# Altium PCB MainBoardReceive.PcbDoc
Units mil, origin at the board's own origin, x right, y up, seen from the top; angles counter-clockwise.
Board outline 3900 x 2915 mil, 2 copper layers (Top Layer, Bottom Layer); 53 components, 33 nets, 163 pads, 11 vias.
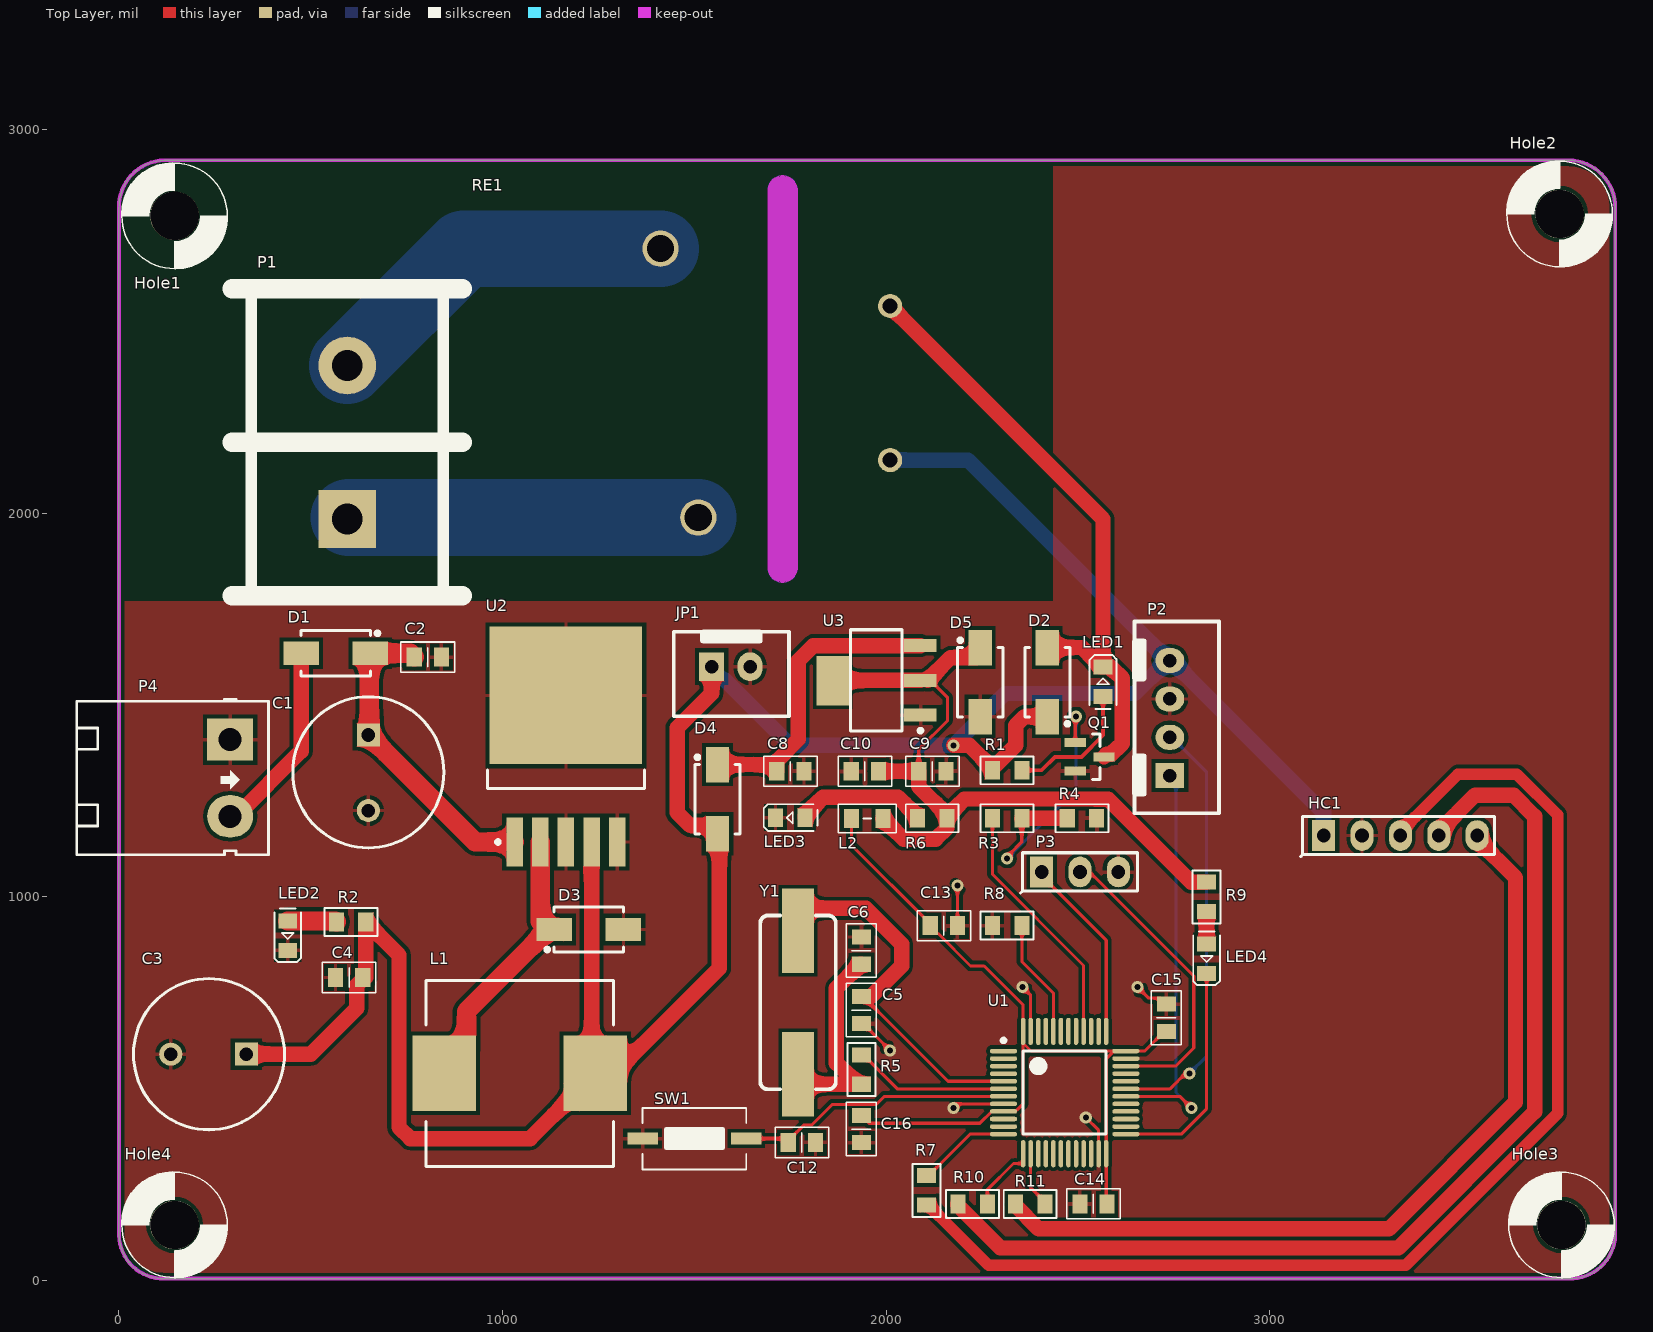
[diagram p0: Top Layer view]
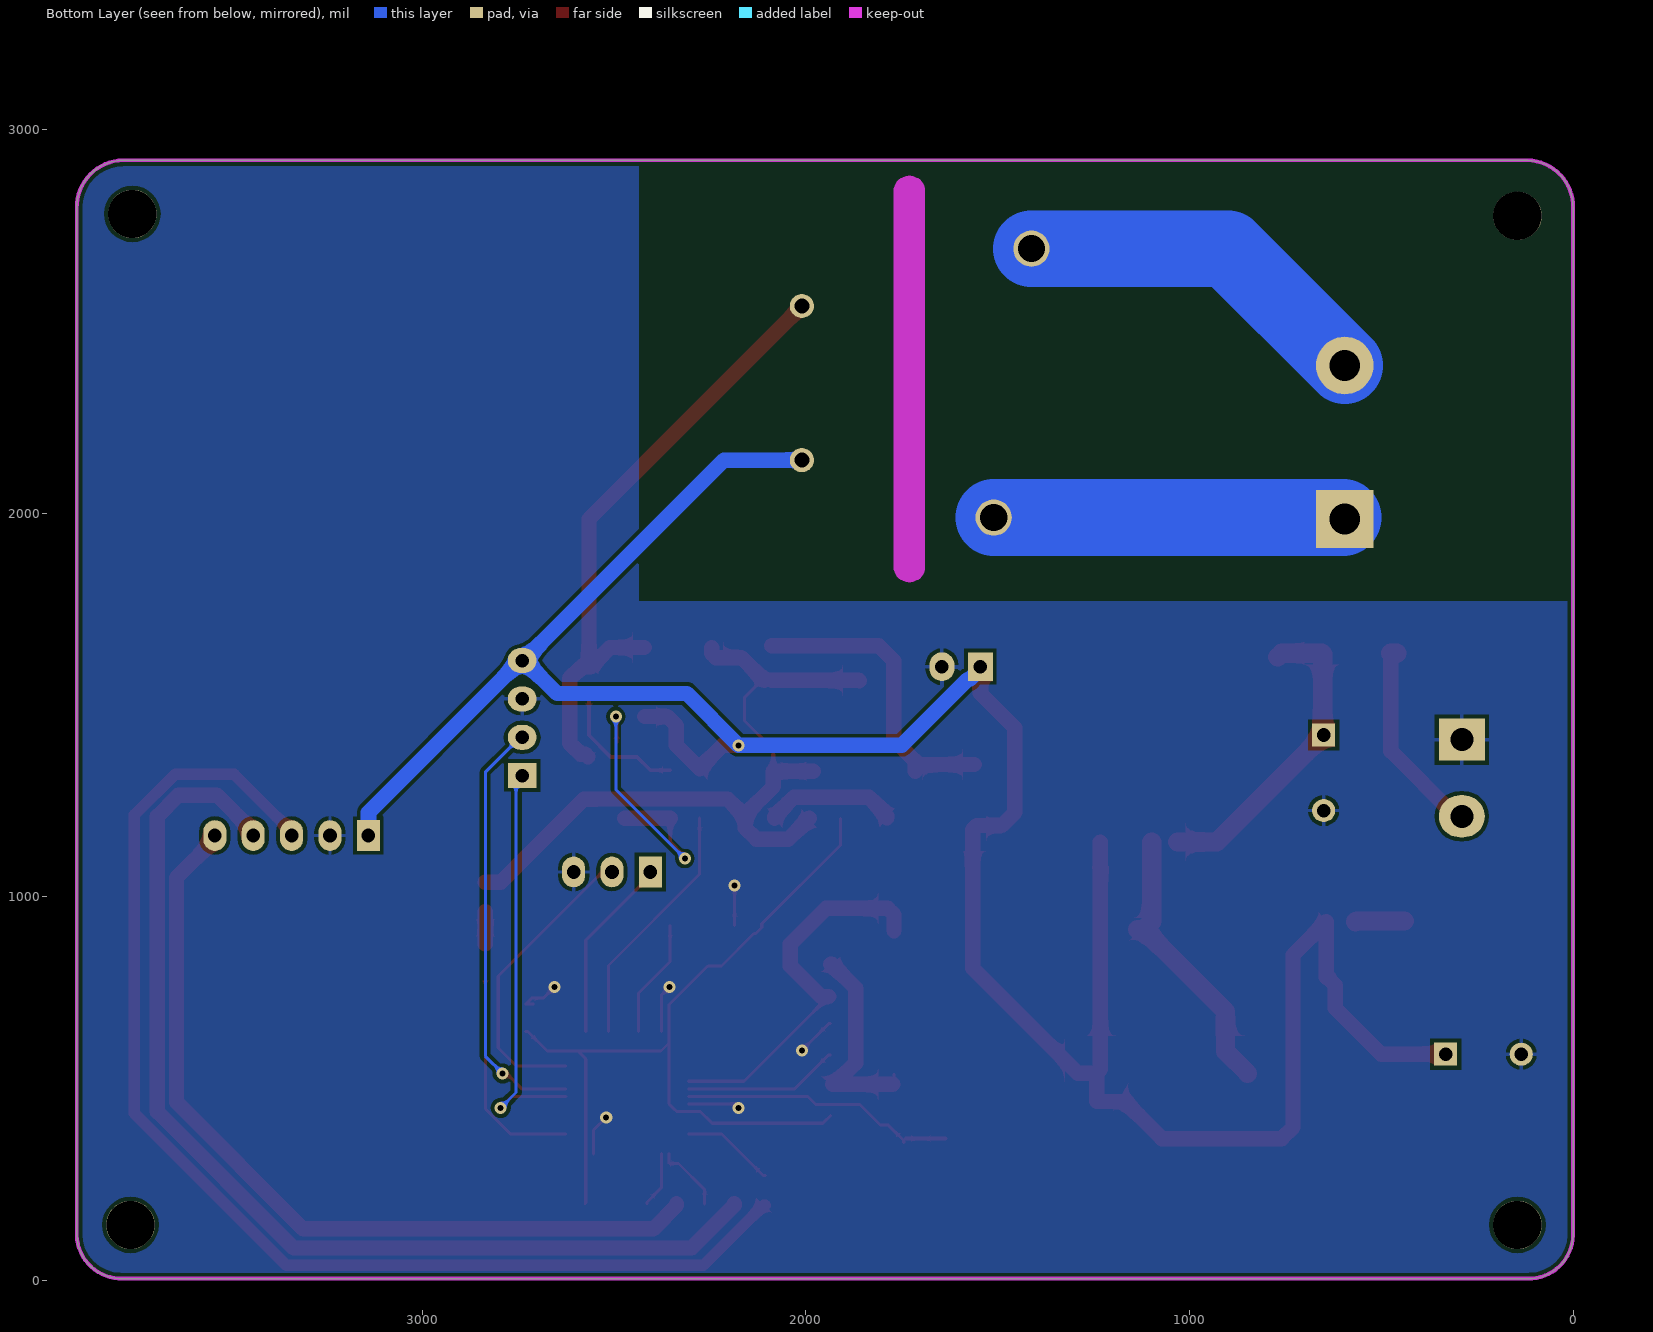
[diagram p1: Bottom Layer view, seen from below]

## Layer stack, top to bottom
Top Solder: solder mask 0.4, Solder Resist, Dk 3.5
Top Layer: signal copper 1.4
Dielectric 1: dielectric 12.6, FR-4, Dk 4.8
Bottom Layer: signal copper 1.4
Bottom Solder: solder mask 0.4, Solder Resist, Dk 3.5

## Board outline
118.11,5 cw(c115.61,120.61) 0,118.11 0,2795.28 cw(c121.42,2798.58) 118.11,2920 3779.53,2920 cw(c3777.4,2797.4) 3900,2795.28 3900,118.11 cw(c3783.21,121.79) 3779.53,5
cut-out: 1690.61,1860 ccw(c1730,1860) 1769.39,1860 1769.39,2840 ccw(c1730,2840) 1690.61,2840

## Design rules (kind name [scope] priority, off if disabled: settings)
Clearance [All] p1: gap=10 ignorepadtopadclearanceinfootprint=FALSE except(0: Arc-Hole Track-Hole SMDPad-Hole THPad-Hole Via-Hole Fill-Hole Poly-Hole Region-Hole Text-Hole; 5: Track-SMDPad SMDPad-SMDPad)
PolygonConnect [All] p1: thpad.connectstyle=Relief thpad.reliefconductorwidth=10 thpad.reliefentries=4 thpad.polygonreliefangle="90 Angle" thpad.airgapwidth=10 smdpad.connectstyle=Relief smdpad.reliefconductorwidth=10 smdpad.reliefentries=4 smdpad.polygonreliefangle="90 Angle" smdpad.airgapwidth=10 via.connectstyle=Direct via.reliefconductorwidth=10 via.reliefentries=4 via.polygonreliefangle="90 Angle" via.airgapwidth=10
RoutingVias [All] p1: holewidth=11.81 width=23.62 viastyle="Through Hole" minholewidth=11.81 minwidth=23.62 maxholewidth=11.81 maxwidth=23.62
SolderMaskExpansion [All] p1: expansion=4
Width [All] p1: maxlimit=200 minlimit=8 preferedwidth=8 minimp=50.000000 maximp=50.000000 favimp=50.000000
30 further rules are at their usual default settings.

## Components (designator, comment, footprint, x,y, rotation, side; value= is the part's Value field where it differs from the comment)
C1 "470uF/50V" CR/D.10.0x16.0/P.5.0 650,1421.85 r270 top
C2 "100nF" "C 0805 (2012)" 805,1625 r0 top
C3 "1000uF/16V" CR/D.10.0x12.5/P.5.0 331.85,590 r180 top
C4 "100nF" "C 0805 (2012)" 600,790 r180 top
C5 "22pF" "C 0805 (2012)" 1935,705 r270 top
C6 "22pF" "C 0805 (2012)" 1935,860 r90 top
C8 "10uF" "C 0805 (2012)" 1750,1327.58 r0 top
C9 "10uF" "C 0805 (2012)" 2120,1327.58 r0 top
C10 "100nF" "C 0805 (2012)" 1944.09,1327.58 r180 top
C12 "100nF" "C 0805 (2012)" 1780,360 r0 top
C13 "100nF" "C 0805 (2012)" 2150,925 r0 top
C14 "100nF" "C 0805 (2012)" 2540,200 r180 top
C15 "100nF" "C 0805 (2012)" 2730,685 r90 top
C16 "10uF" "C 0805 (2012)" 1935,395 r270 top
D1 "SS34" "DO-214AC (SMA)" 565,1635 r0 top
D2 "M7" "DO-214AC (SMA)" 2420,1560 r270 top
D3 "SS34" "DO-214AC (SMA)" 1225,915 r180 top
D4 "SS14" "DO-214AC (SMA)" 1560,1255 r90 top
D5 "SS14" "DO-214AC (SMA)" 2245,1560 r90 top
HC1 "HC12RF" HC12RF 3140,1160 r0 top
Hole1 "3mm" SCREW/3M/7M 145,2775 r0 top
Hole2 "3mm" SCREW/3M/7M 3755,2780 r0 top
Hole3 "3mm" SCREW/3M/7M 3760,145 r0 top
Hole4 "3mm" SCREW/3M/7M 145,145 r0 top
JP1 "JP2" "CON Header 2" 1745,1600 r0 top value="Connector 2"
L1 "100uH" "Inductor SMD 12x12x8" 1045,540 r0 top value="150 mH"
L2 "600 Ohm" "Inductor SMD 0805 (2012)" 1950,1204.55 r0 top
LED1 "Blue Led" "Led SMD 0805" 2565,1560 r90 top
LED2 "Red Led" "Led SMD 0805" 440,900 r270 top
LED3 "Blue Led" "Led SMD 0805" 1750.65,1206.42 r180 top
LED4 "Blue Led" "Led SMD 0805" 2835,840 r270 top
P1 "Header 2" "HDR Terminal 2" 595,1985 r90 top
P2 "Header 4" "CON Header 4" 2710,1515 r90 top
P3 "Header 3" "Header 3" 2405,1065 r0 top
P4 "Header 2" "HDR Domino 2" 290,1410 r270 top
Q1 "C1815" SOT-23 2530,1365 r0 top
R1 "10k" "R 0805 (2012)" 2315,1330 r180 top
R2 "10k" "R 0805 (2012)" 605,935 r0 top
R3 "4k7" "R 0805 (2012)" 2315,1205 r0 top
R4 "47k" "R 0805 (2012)" 2510,1205 r180 top
R5 "330" "R 0805 (2012)" 1935,550 r270 top
R6 "4k7" "R 0805 (2012)" 2119.55,1205 r0 top
R7 "1k" "R 0805 (2012)" 2105,235 r270 top
R8 "10k" "R 0805 (2012)" 2315,925 r0 top
R9 "2k2" "R 0805 (2012)" 2835,1000 r90 top
R10 "1k" "R 0805 (2012)" 2225,200 r180 top
R11 "1k" "R 0805 (2012)" 2375,200 r0 top
RE1 "Relay 5" Relay4 2010,2138.43 r90 top
SW1 "Button" SW/2/SMD 1500,370 r0 top
U1 "STM32F103C8T6" LQFP48_N 2465,490 r0 top
U2 "LM2596S-5.0" TO-263-5 1165,1391.14 r90 top
U3 "AMS1117-3V3" SOT-223 1975,1564.43 r180 top
Y1 "8Mhz" "Crystal HC49US SMD" 1770,725 r90 top

## Footprints (in the part's own frame and the unit in brackets; to place one, negate y for a bottom-side part, rotate by r counter-clockwise, add the part's x,y. Pads: shape width x height; smd on the part's side, far side on the other; paste and mask are expansions set on the pad)
"C 0805 (2012)" [mm] "Chip Capacitor, 2-Leads, Body 2.0x1.3mm, IPC Medium Density"
  rect 1x1.25 smd: 1(-0.9,0) 2(0.9,0)
  silkscreen extent -1.78,-1 1.78,1, body extent -1,-0.64 1,0.61, height 0.6
"CON Header 2" [mil]
  rect 65x75 hole 35.43: 1(-200,0)
  oval 65x75 hole 35.43: 2(-100,0)
  silkscreen extent -299,-129 1,96, body extent -297,-134 -2,94, height 286
"CON Header 4" [mil]
  rect 65x75 hole 35.43: 1(-199,-29)
  oval 65x75 hole 35.43: 2(-99,-29) 3(1,-29) 4(101,-29)
  silkscreen extent -297,-157 203,68, body extent -294,-162 195,64, height 290
CR/D.10.0x12.5/P.5.0 [mil]
  rect 60x60 hole 35.43: 1(0,0)
  round 60 hole 35.43: 2(196.85,0)
  silkscreen extent -100,-197 294,197, body extent -109,-208 304,205, height 551
CR/D.10.0x16.0/P.5.0 [mil]
  rect 60x60 hole 35.43: 1(0,0)
  round 60 hole 35.43: 2(196.85,0)
  silkscreen extent -100,-197 294,197, body extent -110,-206 304,208, height 689
"Crystal HC49US SMD" [mil]
  rect 220.47x82.67 smd: 1(-187,0) 2(187,0)
  silkscreen extent -226,-98 226,98, body extent -250,-93 250,92, height 165
"DO-214AC (SMA)" [mm] "Molded Diode, 2-Leads, Body 4.3x2.7mm, IPC Medium Density"
  rect 2.35x1.55 smd: 1(-2.286,0) 2(2.286,0)
  silkscreen extent -2.3,-1.5 2.89,1.5, body extent -2.6,-1.3 2.6,1.3, height 2.4
HC12RF [mil]
  rect 60x80 hole 35.43: 1(0,0)
  oval 60x80 hole 35.43: 2(100,0) 3(200,0) 4(300,0) 5(400,0)
  silkscreen extent -60,-55 445,50, body extent -50,-50 450,50, height 350
"HDR Domino 2" [mil] "Header 2, 2 pin, hight 300mil, Pin to Pin 200, Colour Green"
  rect 110x120 hole 60: 1(0,0)
  oval 110x120 hole 60: 2(200,0)
  silkscreen extent -105,-400 300,100, body extent -90,-402 302,70, height 334
"HDR Terminal 2" [mil]
  rect 150x150 hole 80: 1(0,0)
  round 150 hole 80: 2(400,0)
  silkscreen extent -200,-300 600,300
"Header 3" [mil]
  rect 60x80 hole 35.43: 1(0,0)
  oval 60x80 hole 35.43: 2(100,0) 3(200,0)
  silkscreen extent -55,-55 250,50, body extent -50,-50 250,50, height 350
"Inductor SMD 12x12x8" [mm] "Precision Wire Wound Inductor, 2-Leads, Body 12.3x12.3mm, IPC Low Density"
  rect 4.2x5 smd: 1(-5,0) 2(5,0)
  silkscreen extent -6.2,-6.15 6.2,6.15, body extent -6.25,-6.25 6.25,6.25, height 8.01
"Inductor SMD 0805 (2012)" [mm] "Precision Wire Wound Inductor, 2-Leads, Body 2.0x1.2mm, IPC Medium Density"
  rect 1x1.25 smd: 1(-1.041,0) 2(1.041,0)
  silkscreen extent -1.92,-0.95 1.92,0.95, body extent -1.05,-0.6 0.95,0.6, height 0.95
"Led SMD 0805" [mm] "Led SMD 0805"
  rect 1x1.25 smd: 1(-0.95,0) 2(1,0)
  silkscreen extent -1.78,-0.89 1.78,0.89, body extent -1.01,-0.62 1.01,0.63, height 1.1
LQFP48_N [mm] "Thin QFP, 48-Leads, Body 7x7mm, Pitch 0.5mm, IPC Medium Density"
  oval 1.8x0.3 smd: 1(-4.05,2.75) 2(-4.05,2.25) 3(-4.05,1.75) 4(-4.05,1.25) 5(-4.05,0.75) 6(-4.05,0.25) 7(-4.05,-0.25) 8(-4.05,-0.75) 9(-4.05,-1.25) 10(-4.05,-1.75) 11(-4.05,-2.25) 12(-4.05,-2.75) 25(4.05,-2.75) 26(4.05,-2.25) 27(4.05,-1.75) 28(4.05,-1.25) 29(4.05,-0.75) 30(4.05,-0.25) 31(4.05,0.25) 32(4.05,0.75) 33(4.05,1.25) 34(4.05,1.75) 35(4.05,2.25) 36(4.05,2.75)
  oval 0.3x1.8 smd: 13(-2.75,-4.05) 14(-2.25,-4.05) 15(-1.75,-4.05) 16(-1.25,-4.05) 17(-0.75,-4.05) 18(-0.25,-4.05) 19(0.25,-4.05) 20(0.75,-4.05) 21(1.25,-4.05) 22(1.75,-4.05) 23(2.25,-4.05) 24(2.75,-4.05) 37(2.75,4.05) 38(2.25,4.05) 39(1.75,4.05) 40(1.25,4.05) 41(0.75,4.05) 42(0.25,4.05) 43(-0.25,4.05) 44(-0.75,4.05) 45(-1.25,4.05) 46(-1.75,4.05) 47(-2.25,4.05) 48(-2.75,4.05)
  silkscreen extent -4.17,-2.75 2.75,3.57, body extent -4.5,-4.47 4.5,4.53, height 1.6
"R 0805 (2012)" [mm] "Chip Resistor, 2-Leads, Body 2.0x1.3mm, IPC Medium Density"
  rect 1x1.25 smd: 1(-0.975,0) 2(0.975,0)
  silkscreen extent -1.75,-0.92 1.75,0.92, body extent -1,-0.61 1,0.59, height 0.5
Relay4 [mm]
  round 1.6 hole 1: 1(0,0) 2(10.2,0)
  round 2.4 hole 1.8: 3(-3.8,12.7) 4(14,15.2)
  body extent -7.96,-7.16 19.47,25.36, height 20.04
SCREW/3M/7M [mm]
  round 3.2 hole 3.2: 1(0,0)
  silkscreen extent -3.54,-3.53 3.53,3.54
SOT-23 [mm] "SOT23, 3-Leads, Body 3.0x2.5mm (max), Pitch 0.95mm, IPC Medium Density"
  rect 1.4x0.6 smd: 1(-0.95,0.95) 2(-0.95,-0.95) 3(0.95,0)
  silkscreen extent 0.2,-1.5 0.7,1.5, body extent -1.28,-1.46 1.27,1.46, height 0.95
SOT-223 [mm] "SOT223, 4-Leads, Body 6.7x7.3mm (max), Pitch 2.30mm, IPC Medium Density"
  rect 2.15x0.85 smd: 1(-2.899,2.3) 2(-2.899,0) 3(-2.899,-2.3)
  rect 2.15x3.25 smd: 4(2.899,0.025)
  silkscreen extent -3.02,-3.35 1.72,3.45, body extent -3.51,-3.25 3.49,3.25, height 1.64
SW/2/SMD [mil]
  rect 80x31.5 smd: 1(-135,0) 2(135,0)
  silkscreen extent -135,-80 135,80, body extent -120,-73 120,73, height 98
TO-263-5 [mm] "D2-PAK, 6-Pads, Body 8.9x10.4mm (max), IPC Medium Density"
  rect 3.25x1.1 smd: 1(-6.3,3.4) 2(-6.3,1.7) 3(-6.3,0) 4(-6.3,-1.7) 5(-6.3,-3.4)
  rect 9.1x10.1 smd: 6(3.4,0)
  silkscreen extent -6.42,-5.2 -1.55,5.2, body extent -7.56,-4.98 8.11,5.02, height 4.83

## Part data
C1 C3: library part Capacitor, "Capacitor pol"
C2 C4 C5 C6 C8 C9 C10 C12 C13 C14 C15 C16: library part "Capacitor NP", "Capacitor non-pol"
D1 D3 D4 D5: library part "Diode Schottky", "Schottky Diode", Code_JEDEC=DO-214-AA, LatestRevisionDate=17-Jul-2002, LatestRevisionNote="Re-released for DXP Platform.", PackageReference=SMB, Published=8-Jun-2000, Publisher="Altium Limited"
D2: library part Diode, "Default Diode", Code_JEDEC=DO-214-AB, LatestRevisionDate=17-Jul-2002, LatestRevisionNote="Re-released for DXP Platform.", PackageReference=SMC, PackageVersion=Sep-1996, Published=8-Jun-2000, Publisher="Altium Limited"
Hole1 Hole2 Hole3 Hole4: library part Screw
JP1: library part Con2, "Connector 2"
L1: library part L1, "Inductor"
L2: library part Inductor, "Inductor"
LED1 LED2 LED3 LED4: library part Led, "Typical LED"
P1 P4: "Header, 2-Pin", LatestRevisionDate=17-Jul-2002, LatestRevisionNote="Re-released for DXP Platform.", Publisher="Altium Limited"
P2: "Header, 4-Pin"
P3: "Header, 3-Pin"
Q1: library part "Transistor NPN", "NPN Bipolar Transistor"
R1 R2 R3 R4 R5 R6 R7 R8 R9 R10 R11: library part Resistor, "Resistor", LatestRevisionDate=17-Jul-2002, LatestRevisionNote="Re-released for DXP Platform.", PackageReference=AXIAL-0.3, Published=8-Jun-2000, Publisher="Altium Limited"
SW1: library part "SW SPST", "Tact switch 2 pin"
U1: "STM32 ARM-based 32-bit MCU with 64 Kbytes Flash, 48-pin LQFP, Industrial Temperature", ComponentLink1Description="Manufacturer Link", ComponentLink1URL=www.st.com/stm32, ComponentLink2Description=Datasheet, ComponentLink2URL=http://www.st.com/stonline/products/literature/ds/13587.pdf, DatasheetVersion="rev6, Mar-2008", PackageDescription="48-Pin Low-Profile Quad Flat Pack, 7 x 7 mm Body, 0.5 mm Pitch (LQFP48)", PackageReference=LQFP48, PackageVersion=Mar-2008, Published=30-May-2008, Publisher="Altium Limited"
U2: library part LM2576/96, "SIMPLE SWITCHER® 3A Step-Down Voltage Regulator"
U3: library part AMS1117, "1A LDO Voltage Regulator, ADJ or fixed 1.5/1.8/2.5/2.85/3.3/5V"
Y1: library part Crystal

## Via types
v1: diameter 31.5, hole 15.75, Top Layer to Bottom Layer, tented both sides, 10 vias
v2: diameter 31.5, hole 15.75, Top Layer to Bottom Layer, 1 vias

## Nets (pads, with @x,y where several pads share a name; then routed paths per layer and width w, separated by ;. In a path a pad name is that pad's centre, name@x,y a point inside that pad or via, vN(x,y) a via of type N, cw(c..) or ccw(c..) an arc to the next point about the centre after c; other vN are vias at no path point)
3V3: C9.1 C10.1 D5.2 L2.2 R6.2 R9.2 U3.2 U3.4 | length 1993.2
  Top Layer w8: C9.1 2084.57,1384.57 2160,1460 2160,1519.17 2114.73,1564.43 2108.2,1564.43 U3.2
  Top Layer w40: U3.4 1861.86,1564.43 U3.2 ; C10.1 C9.1 2084.57,1288.31 2157.93,1214.95 R6.2@2157.93,1209.29 ; L2.2 2045.15,1150.39 2128.64,1150.39 2157.93,1179.68 R6.2 R6.2@2157.93,1209.29 ; U3.2@2108.2,1564.43 2167.5,1623.74 2234.49,1623.74 2245,1634.25 D5.2 ; R9.2 2794.65,1038.39 2578.43,1254.61 2545.39,1254.61 2545,1255 2203.64,1255 R6.2@2157.93,1209.29
DEBUG_LED: LED4.2 U1.25 | length 590.7
  Top Layer w8: U1.25 2768.8,381.73 2835,447.93 LED4.2
GND: C1.2 C2.2 C3.2 C4.2 C5.2 C6.2 C8.2 C9.2 C10.2 C12.2 C13.2 C14.2 C15.2 C16.2 D3.1 D5.1 HC1.2 JP1.2 LED2.2 LED3.2 P2.3 P3.3 P4.1 Q1.2 R4.1 R8.1 SW1.1 U1.8 U1.23 U1.35 U1.47 U2.3 U2.5 U2.6 U3.1 | length 697.6
  Top Layer w8: C5.2 1939.92,669.57 v1(2009.49,600) v1@2010,600 ; v1(2175,450) 2185.47,460.47 U1.8 ; v1@2180,1035 v1(2185.43,1029.57) C13.2 ; v1(2355,765) 2376.42,743.58 U1.47 ; v2(2520,425) 2553.58,391.42 U1.23 ; v1(2655,765) 2683.88,736.12 2714.31,736.12 C15.2 C15.2@2709.57,720.43
NetC5_1: C5.1 U1.5 Y1.2 | length 1009.1
  Top Layer w8: C5.1 1939.92,740.43 2160.83,519.53 U1.5
  Top Layer w40: Y1.2 1770,953.67 1786.33,970 1947.15,970 2040,877.15 2040,820 1960.43,740.43 C5.1@1939.92,740.43
NetC6_1: C6.1 R5.2 Y1.1 | length 553.9
  Top Layer w8: Y1.1 1770,514.45 Y1.1@1772.84,511.61 ; R5.2@1930.08,511.61 R5.2
  Top Layer w40: Y1.1@1772.84,511.61 R5.2@1925.05,511.61 ; R5.2@1930.08,511.61 R5.2@1925.05,511.61 ; C6.1 1932.42,824.57 1870,762.15 1870,566.67 R5.2@1925.05,511.61
NetC8_1: C8.1 D4.2 U3.3 | length 807.9
  Top Layer w40: D4.2 1697.15,1345 C8.1 1714.57,1354.57 1770.13,1410.13 1770.13,1615.13 1810,1655 U3.3
NetC12_1: C12.1 SW1.2 U1.7 | length 717.5
  Top Layer w8: C12.1 1744.57,364.92 1784.65,405 1805,405 1859.12,459.12 1974.12,459.12 1995.16,480.16 U1.7
  Top Layer w10: SW1.2 C12.1@1738.86,370
NetD1_1: D1.1 P4.2 | length 526.2
  Top Layer w40: P4.2 305,1210 475,1380 D1.1
  Top Layer w50: D1.1@459.25,1635 D1.1
NetD2_1: D2.1 LED1.2 Q1.3 RE1.2 | length 1631
  Top Layer w40: RE1.2 2565,1985 LED1.2 ; D2.1 2510.51,1650 2560.39,1600.12 2560.39,1599.7 2560.71,1599.39 LED1.2 ; Q1.3 2574.36,1371.96 2586.96,1371.96 2615,1400 2615,1570 2585.61,1599.39 LED1.2
NetD3_2: D3.2 L1.1 U2.2 | length 739.9
  Top Layer w50: L1.1 905.83,597.68 905.83,701.57 D3.2@1119.25,915 ; U2.2 1098.07,936.18 D3.2@1119.25,915 ; D3.2 D3.2@1119.25,915
NetHC1_3: HC1.3 R7.2 | length 3177.5
  Top Layer w30: R7.2 2109.92,196.61 2266.54,40 3353.64,40 3750,436.36 3750,1213.64 3643.64,1320 3490,1320 3340,1170 HC1.3
NetHC1_4: HC1.4 R10.2 | length 2792.7
  Top Layer w40: R10.2 2186.61,195.71 2297.32,85 3335,85 3690,440 3690,1210 3635,1265 3535,1265 3440,1170 HC1.4
NetHC1_5: HC1.5 R11.1 | length 2205.9
  Top Layer w40: R11.1 2336.61,195.71 2397.32,135 3310,135 3640,465 3640,1050 3540,1150 HC1.5
NetLED1_1: LED1.1 R1.1 | length 350.8
  Top Layer w10: R1.1 2405,1330 2440,1365 2508.71,1365 2565,1421.29 LED1.1
NetLED2_1: LED2.1 R2.1 | length 127.6
  Top Layer w50: LED2.1 564.23,937.39 R2.1
NetLED3_1: LED3.1 R6.1 | length 344.5
  Top Layer w40: LED3.1 1788.04,1210.71 1800,1222.67 1800,1225 1835,1260 2030.45,1260 2081.16,1209.29 R6.1
NetLED4_1: LED4.1 R9.1 | length 84.2
  Top Layer w40: LED4.1 R9.1
NetP1_1: P1.1 RE1.3 | length 922
  Top Layer w8: P1.1 P1.1@598.82,1988.82
  Bottom Layer w40: P1.1 P1.1@598.82,1988.82
  Bottom Layer w200: P1.1@598.82,1988.82 RE1.3
NetP1_2: P1.2 RE1.4 | length 942.7
  Bottom Layer w200: P1.2 899.61,2689.61 RE1.4
NetQ1_1: Q1.1 R3.2 R4.2 | length 740.2
  Top Layer w8: v1@2320,1110 2353.39,1143.39 R3.2 ; Q1.1 2492.6,1467.6 v1(2495,1470)
  Top Layer w40: R3.2 R4.2
  Bottom Layer w8: v1(2315,1100) 2495,1280 v1(2495,1470)
NetR5_1: R5.1 U1.6 | length 407.2
  Top Layer w8: R5.1 1939.92,588.39 2028.46,499.84 U1.6
NetR8_2: R8.2 U1.44 | length 309.6
  Top Layer w8: R8.2 2353.39,831.61 2435.47,749.53 U1.44
OUTPUT_RELAY: R3.1 U1.40 | length 654
  Top Layer w8: R3.1 2276.61,1058.79 2514.21,821.19 U1.40
"SET HC12": R11.2 U1.14 | length 145.9
  Top Layer w8: U1.14 2376.42,241.89 2413.39,204.92 R11.2
SWCLK: P3.1 U1.37 | length 485.2
  Top Layer w8: P3.1 2405,1055 2573.27,886.73 U1.37
SWDIO: P3.2 U1.34 | length 792.6
  Top Layer w8: P3.2 2530,1065 2801.39,793.61 2801.39,606.39 2753.9,558.9 U1.34
USART1_RX: P2.1 U1.30 | length 1072.2
  Top Layer w8: U1.30 2764.84,480.16 v1(2795,450)
  Bottom Layer w8: P2.1 2755,1300 2755,490 v1(2795,450)
USART1_TX: P2.2 U1.31 | length 1119.5
  Top Layer w8: U1.31 2739.84,499.84 2780,540 v1(2790,540)
  Bottom Layer w8: P2.2 2744,1416 2835,1325 2835,585 v1(2790,540)
USART2_RX: R10.1 U1.13 | length 182.8
  Top Layer w8: R10.1 2263.39,236.61 2331.8,305.02 2354.97,305.02 2356.73,306.78 U1.13
USART2_TX: R7.1 U1.12 | length 245.4
  Top Layer w8: R7.1 2109.92,273.39 2218.27,381.73 U1.12
VCC: C3.1 C4.1 D2.2 D4.1 HC1.1 JP1.1 L1.2 P2.4 R1.2 R2.2 RE1.1 U2.4 | length 7044.6
  Top Layer w8: R1.2 2276.61,1334.29 R1.2@2276.61,1334.92
  Top Layer w40: C3.1 500,590 619.75,709.75 619.75,769.39 635.43,785.08 C4.1 643.39,790 R2.2 730,848.39 730,399.29 759.29,370 1071.85,370 1168.43,466.57 1241.85,466.57 L1.2 ; U2.4 1231.93,549.92 L1.2 ; JP1.1 1545,1530.43 1455,1440.43 1455,1220 1488.74,1186.26 1554.49,1186.26 1565,1175.75 1565,814.33 1290.67,540 L1.2 ; v1(2175,1395) 2216.54,1395 R1.2@2276.61,1334.92 ; R1.2@2276.61,1334.29 2337.32,1395 2337.32,1446.57 2360.75,1470 D2.2 ; P2.4@2738.03,1616 P2.4 P2.4@2744,1616
  Bottom Layer w40: JP1.1 1545,1595 1573.5,1566.5 1578.5,1566.5 1750,1395 v1(2175,1395) 2310,1530 2648,1530 2734,1616 P2.4@2735.41,1616 ; RE1.1 2212.98,2138.43 P2.4@2735.41,1616 ; HC1.1 3140,1220 2744,1616 P2.4 P2.4@2735.41,1616
VDD: C13.1 C14.1 C15.1 C16.1 L2.1 U1.9 U1.24 U1.36 U1.48 | length 2215.1
  Top Layer w8: L2.1 1909,1135.49 2114.57,929.92 C13.1 2114.57,920.08 2130.25,904.39 2135.17,904.39 2219.57,820 2255,820 2356.73,718.27 U1.48 U1.48@2356.73,618.89 ; C16.1 1955.43,410 2243.84,410 2274.63,440.79 U1.9 2336.11,440.79 2340.89,445.57 2341.25,445.57 2356.73,461.05 U1.48@2356.73,618.89 ; C14.1 2573.27,202.17 U1.24 2573.27,578.01 2588.75,593.49 2589.11,593.49 U1.36@2593.89,598.27 ; C15.1 2725.08,649.57 2673.78,598.27 U1.36 U1.36@2593.89,598.27 ; U1.48@2356.73,618.89 2361.51,614.11 2361.51,613.75 2376.99,598.27 U1.36@2593.89,598.27
VIN: C1.1 C2.1 D1.2 U2.1 | length 830.5
  Top Layer w50: C2.1 759.57,1635 D1.2 652.5,1632.5 652.5,1424.35 C1.1 928.74,1143.11 U2.1
pads on no net: Hole1.1 Hole2.1 Hole3.1 Hole4.1 U1.1 U1.2 U1.3 U1.4 U1.10 U1.11 U1.15 U1.16 U1.17 U1.18 U1.19 U1.20 U1.21 U1.22 U1.26 U1.27 U1.28 U1.29 U1.32 U1.33 U1.38 U1.39 U1.41 U1.42 U1.43 U1.45 U1.46

## Polygon pours and split planes (outlines as drawn)
GND on Top Layer "Top Layer-GND" (solid, pour order 10): 10,-5 0,5 0,2940 3870,2925 3887.5,2907.5 3900,20 30,20 10,0
GND on Top Layer "Top Layer-GND 1" (solid, pour order 6): 885,-150
GND on Bottom Layer "Bottom Layer-GND" (solid, pour order 8): 0,2935 3895,2935 3895,5 25,5 0,-20

## Keep-outs
Keep-Out Layer:
  pour cut-out: 1690.61,1860 ccw(c1730,1860) 1769.39,1860 1769.39,2840 ccw(c1730,2840) 1690.61,2840
  lines w10: 0,118.11 ccw(c115.61,120.61) 118.11,5 3779.53,5 ccw(c3783.21,121.79) 3900,118.11 3900,2795.28 ccw(c3777.4,2797.4) 3779.53,2920 118.11,2920 ccw(c121.42,2798.58) 0,2795.28 0,118.11
  lines w78.74: 1730,1860 1730,2840

## Other copper
Top Layer:
  pour cut-out: 2320,3165
  pour cut-out: 2435,2910 2435,1770 0,1770 0,2930 2415,2930
Bottom Layer:
  pour cut-out: 2300,3195
  pour cut-out: 2420,2925 2435,2910 2435,1770 0,1770 -5,1775 0,1780 0,2935 2405,2935 2420,2920
  pour cut-out: 5,1705

## Silkscreen, mask and mechanical layers (free items; w line width, h text height)
Bottom Solder:
  lines w10: 1506.18,1985 ccw(c1506.18,1988.82) 1510,1988.82
  lines w100: 595,1985 1506.18,1985 ; 595,2385 899.61,2689.61 1411.57,2689.61